# Altium PCB 接口板.PcbDoc
Units mm, origin at the board's own origin, x right, y up, seen from the top; angles counter-clockwise.
Board outline 100 x 250 mm, 2 copper layers (Top Layer, Bottom Layer); 107 components, 70 nets, 276 pads, 0 vias.
Unrouted connection lines stored in the file: 196.
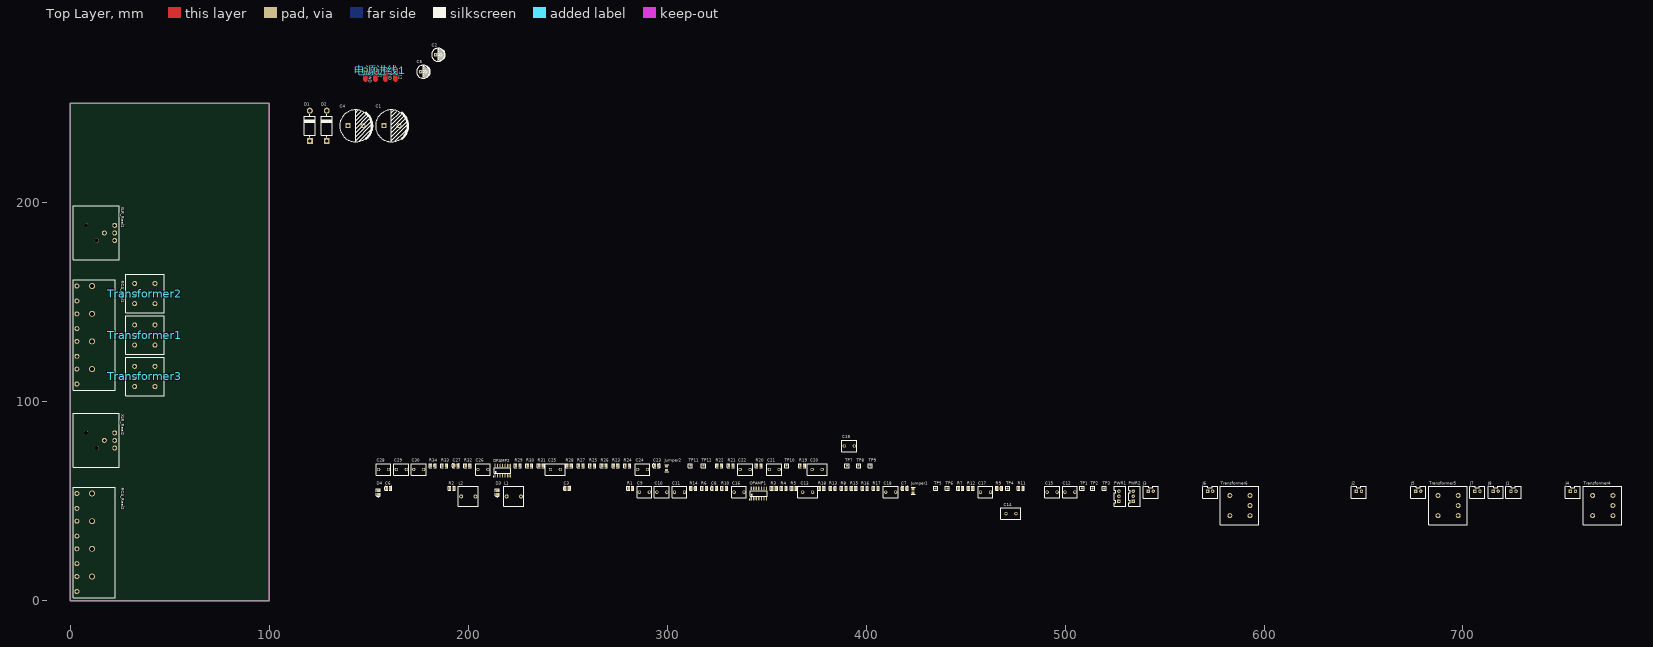
[diagram p0: Top Layer view]
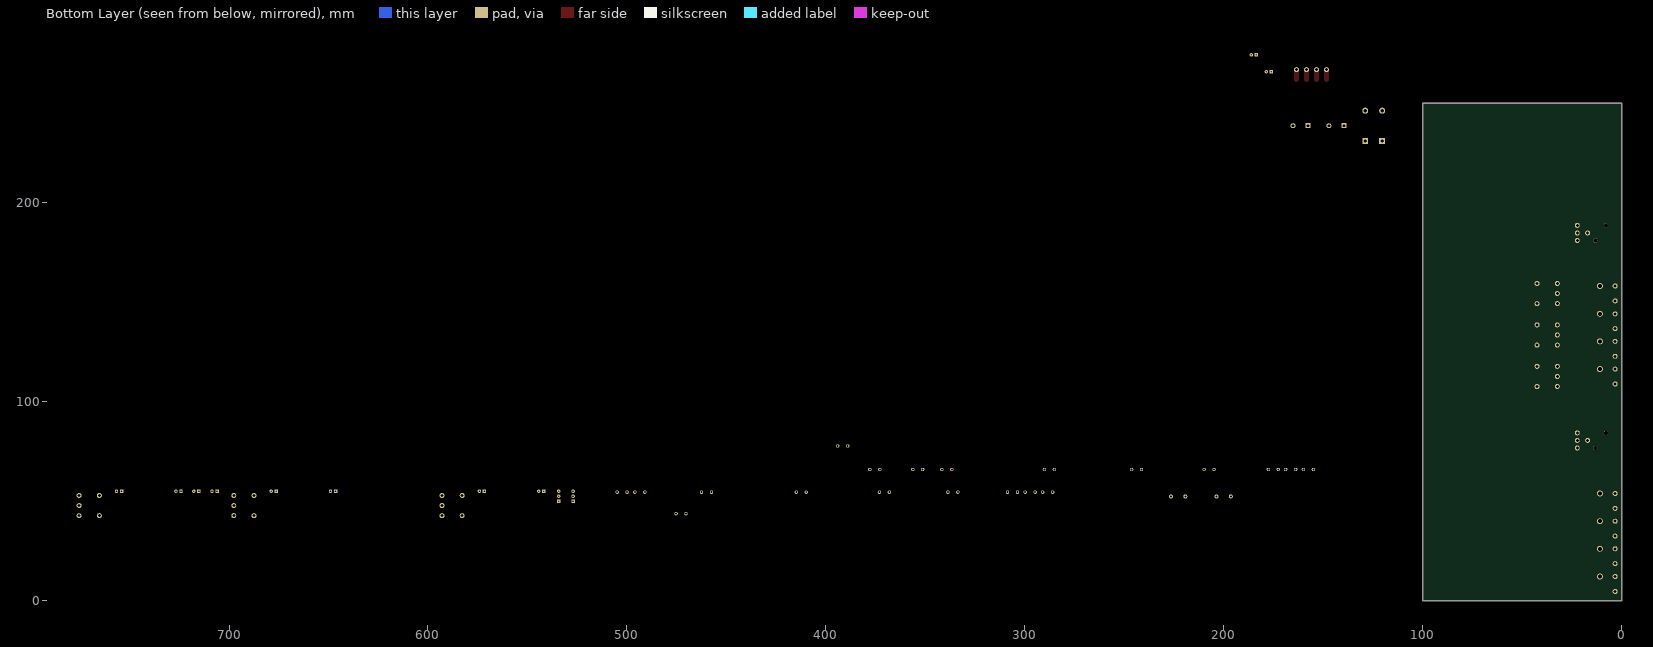
[diagram p1: Bottom Layer view, seen from below]

## Layer stack, top to bottom
Top Solder: solder mask 0.0102, Solder Resist, Dk 3.5
Top Layer: signal copper 0.0356
Dielectric 1: dielectric 0.32, FR-4, Dk 4.8
Bottom Layer: signal copper 0.0356
Bottom Solder: solder mask 0.0102, Solder Resist, Dk 3.5

## Board outline
0,0 0,250 100,250 100,0

## Design rules (kind name [scope] priority, off if disabled: settings)
BoardOutlineClearance [All] p1: gap=0.4 ignorepadtopadclearanceinfootprint=FALSE
Clearance [All] p1: gap=0.152 ignorepadtopadclearanceinfootprint=FALSE
ComponentClearance [All] p1: gap=0.152 collisioncheckmode=3 verticalgap=0 showdistances=FALSE
Height [All] p1: minheight=0 maxheight=50 prefheight=12.7
HoleSize [All] p1: absolutevalues=TRUE maxlimit=6 minlimit=0.3 maxpercent=80.000 minpercent=20.000
HoleToHoleClearance [All] p1: gap=0.152 allowstackedmicrovias=TRUE
MinimumSolderMaskSliver [All] p1: minsoldermaskwidth=0.152
PolygonConnect [All] p1: connectstyle=Relief reliefconductorwidth=0.254 reliefentries=4 polygonreliefangle="90 Angle" airgapwidth=0.254
RoutingVias [All] p1: holewidth=0.3 width=0.6 viastyle="Through Hole" minholewidth=0.3 minwidth=0.6 maxholewidth=3 maxwidth=4
SilkToSilkClearance [All] p1: silktosilkclearance=0
SilkToSolderMaskClearance [IsPad] p1: minsilkscreentomaskgap=0 clearancetoexposedcopper=TRUE
SolderMaskExpansion [All] p1: expansion=0.102
Width [All] p1: maxlimit=5 minlimit=0.152 preferedwidth=0.254
23 further rules are at their usual default settings.

## Classes and differential pairs
component class 接口板: C1 C2 C3 C4 C5 C6 C7 C8 C9 C10 C11 C12 C13 C14 C15 C16 C17 C18 D1 D2 D3 D4 J1 J2 J3 J4 J5 J6 J7 J8 Jumper1 L1 L2 OPAMP1 PWR1 PWR2 R1 R2 R3 R4 R5 R6 R7 R8 R9 R10 R11 R12 R13 R14 R15 R16 R17 R18 RCA_Real1 RCA_Real2 TP1 TP2 TP3 TP4 TP5 TP6 Transformer1 Transformer2 Transformer3 Transformer4 Transformer5 Transformer6 XLR_Real1 XLR_Real2 电源进线1
component class 接口板2: C19 C20 C21 C22 C23 C24 C25 C26 C27 C28 C29 C30 Jumper2 OPAMP2 R19 R20 R21 R22 R23 R24 R25 R26 R27 R28 R29 R30 R31 R32 R33 R34 TP7 TP8 TP9 TP10 TP11 TP12

## Components (designator, comment, footprint, x,y, rotation, side; value= is the part's Value field where it differs from the comment)
C1 "3300u" "CAP 7.5*16*31.5 - BK" 161.417,238.633 r0 top
C2 "100u" "CAP 2.5*6.3*11.2" 184.91,274.32 r0 top
C3 "0805,103" 0805_C 249.682,56.388 r0 top
C4 "3300u" "CAP 7.5*16*31.5 - BK" 143.383,238.633 r0 top
C5 "10u" "CAP 2.5*6.3*11.2" 177.399,265.811 r0 top
C6 "0805,103" 0805_C 159.893,56.388 r0 top
C7 "0805,0.01u" 0805_C 419.354,56.388 r0 top
C8 "0805,0.01u" 0805_C 323.723,56.388 r0 top
C9 "100P" WIMA_5MM 288.544,54.483 r0 top
C10 "100P" WIMA_5MM 297.307,54.483 r0 top
C11 "100P" WIMA_5MM 306.197,54.483 r0 top
C12 "100P" WIMA_5MM 502.412,54.483 r0 top
C13 "330N,WIMA" WIMA_5mmPin*10mmL 370.586,54.483 r0 top
C14 "330N" WIMA_5mmPin*10mmL 472.781,43.688 r0 top
C15 "220P" WIMA_5MM 493.522,54.483 r0 top
C16 "47N" WIMA_5MM 336.169,54.483 r0 top
C17 "WIMA" WIMA_5MM 459.994,54.483 r0 top
C18 "WIMA" WIMA_5MM 412.369,54.483 r0 top
C19 "100P" WIMA_5MM 391.541,77.724 r0 top
C20 "330N" WIMA_5mmPin*10mmL 375.412,65.913 r0 top
C21 "220P" WIMA_5MM 353.822,65.913 r0 top
C22 "WIMA" WIMA_5MM 339.217,65.913 r0 top
C23 "0805,0.01u" 0805_C 294.64,67.818 r0 top
C24 "WIMA" WIMA_5MM 287.655,65.913 r0 top
C25 "330N,WIMA" WIMA_5mmPin*10mmL 243.84,65.913 r0 top
C26 "47N" WIMA_5MM 207.391,65.913 r0 top
C27 "0805,0.01u" 0805_C 193.802,67.818 r0 top
C28 "100P" WIMA_5MM 157.48,65.913 r0 top
C29 "100P" WIMA_5MM 166.37,65.913 r0 top
C30 "100P" WIMA_5MM 175.133,65.913 r0 top
D1 "100V3A" DO-201AD 120.396,238.633 r90 top
D2 "100V3A" DO-201AD 128.905,238.633 r90 top
D3 "红灯 0805" 0805_LED_S3 214.63,54.356 r90 top
D4 "红灯 0805" 0805_LED_S3 154.813,54.356 r90 top
J1 "音频输出" XH2.54-LI-2P 725.424,54.991 r0 top
J2 "音频输出" XH2.54-LI-2P 647.7,54.991 r0 top
J3 "音频输出" XH2.54-LI-2P 543.052,54.991 r0 top
J4 "音频输出" XH2.54-LI-2P 755.269,54.991 r0 top
J5 "音频输出" XH2.54-LI-2P 677.545,54.991 r0 top
J6 "音频输出" XH2.54-LI-2P 572.897,54.991 r0 top
J7 "音频输出" XH2.54-LI-2P 707.263,54.991 r0 top
J8 "音频输出" XH2.54-LI-2P 716.407,54.991 r0 top
Jumper1 "Jumper" 0805_J 423.672,55.118 r90 top
Jumper2 "Jumper" 0805_J 299.72,66.548 r90 top
L1 "330uH" INDUCTOR 222.885,52.324 r0 top
L2 "330uH" INDUCTOR 200.025,52.324 r0 top
OPAMP1 "4277UA" SOIC-14_150MIL 346.075,53.848 r0 top
OPAMP2 "4277UA" SOIC-14_150MIL 217.297,65.278 r0 top
PWR1 "电源接口" XH2.54-LI-3P 527.05,52.451 r90 top
PWR2 "电源接口" XH2.54-LI-3P 534.289,52.451 r90 top
R1 "0805,1k" 0805_R 281.559,56.388 r0 top
R2 "0805,1k" 0805_R 191.77,56.388 r0 top
R3 "0805,2.87K" 0805_R 353.695,56.388 r0 top
R4 "0805,1.47K" 0805_R 358.648,56.388 r0 top
R5 "0805,750Ω" 0805_R 363.728,56.388 r0 top
R6 "0805,5.11K" 0805_R 318.643,56.388 r0 top
R7 "0805,5.11K" 0805_R 447.421,56.388 r0 top
R8 "0805,5.11K" 0805_R 388.747,56.388 r0 top
R9 "0805,5.11K" 0805_R 466.852,56.388 r0 top
R10 "0805,16.2K" 0805_R 328.676,56.388 r0 top
R11 "0805,2.87K" 0805_R 477.774,56.388 r0 top
R12 "0805,1.78K" 0805_R 452.501,56.388 r0 top
R13 "0805,750Ω" 0805_R 383.159,56.388 r0 top
R14 "0805,1.62K" 0805_R 313.055,56.388 r0 top
R15 "0805,0.1Ω" 0805_R 393.7,56.388 r0 top
R16 "0805,0.1Ω" 0805_R 399.288,56.388 r0 top
R17 "0805" 0805_R 404.876,56.388 r0 top
R18 "0805,0.1Ω" 0805_R 377.571,56.388 r0 top
R19 "0805,2.87K" 0805_R 367.919,67.818 r0 top
R20 "0805,5.11K" 0805_R 346.075,67.818 r0 top
R21 "0805,5.11K" 0805_R 331.978,67.818 r0 top
R22 "0805,1.78K" 0805_R 326.136,67.818 r0 top
R23 "0805,0.1Ω" 0805_R 274.066,67.818 r0 top
R24 "0805" 0805_R 279.908,67.818 r0 top
R25 "0805,5.11K" 0805_R 262.382,67.818 r0 top
R26 "0805,0.1Ω" 0805_R 268.224,67.818 r0 top
R27 "0805,750Ω" 0805_R 256.54,67.818 r0 top
R28 "0805,0.1Ω" 0805_R 250.698,67.818 r0 top
R29 "0805,2.87K" 0805_R 224.917,67.818 r0 top
R30 "0805,1.47K" 0805_R 230.759,67.818 r0 top
R31 "0805,750Ω" 0805_R 236.601,67.818 r0 top
R32 "0805,16.2K" 0805_R 199.644,67.818 r0 top
R33 "0805,5.11K" 0805_R 187.96,67.818 r0 top
R34 "0805,1.62K" 0805_R 182.118,67.818 r0 top
RCA_Real1 "RCA接口_Real" RCA_REAL 12.065,133.47 r90 top
RCA_Real2 "RCA接口_Real" RCA_REAL 12.065,29.21 r90 top locked
TP1 "测试点" TESTPOINT 508.508,56.388 r0 top
TP2 "测试点" TESTPOINT 513.842,56.388 r0 top
TP3 "测试点" TESTPOINT 519.684,56.388 r0 top
TP4 "测试点" TESTPOINT 471.17,56.388 r0 top
TP5 "测试点" TESTPOINT 434.975,56.388 r0 top
TP6 "测试点" TESTPOINT 440.817,56.388 r0 top
TP7 "测试点" TESTPOINT 390.398,67.818 r0 top
TP8 "测试点" TESTPOINT 396.24,67.818 r0 top
TP9 "测试点" TESTPOINT 402.082,67.818 r0 top
TP10 "测试点" TESTPOINT 360.045,67.818 r90 top
TP11 "测试点" TESTPOINT 311.658,67.818 r90 top
TP12 "测试点" TESTPOINT 318.262,67.818 r90 top
Transformer1 "隔离变压器" TRANSFORMER 37.592,133.477 r180 top
Transformer2 "隔离变压器" TRANSFORMER 37.592,154.305 r180 top
Transformer3 "隔离变压器" TRANSFORMER 37.592,112.649 r180 top
Transformer4 "隔离变压器" TRANSFORMER 770.128,47.752 r0 top
Transformer5 "隔离变压器" TRANSFORMER 692.404,47.752 r0 top
Transformer6 "隔离变压器" TRANSFORMER 587.756,47.752 r0 top
XLR_Real1 "XLR接插口" XLR_REAL 13.081,184.785 r270 top
XLR_Real2 "XLR接插口" XLR_REAL 13.081,80.518 r270 top locked
电源进线1 "接口板电源进线" AC_ADAPTOR_INPUT 155.956,266.827 r270 top

## Footprints (in the part's own frame and the unit in brackets; to place one, negate y for a bottom-side part, rotate by r counter-clockwise, add the part's x,y. Pads: shape width x height; smd on the part's side, far side on the other; paste and mask are expansions set on the pad)
0805_C [mm]
  rect 1.16x1.47 smd: 1(-0.89,0) 2(0.89,0)
  silkscreen extent -1.77,-1.04 1.77,1.04, body extent -1,-0.62 1,0.63, height 0.77
0805_J [mm]
  rect 1.16x1.47 smd: 1(-0.89,0) 2(0.89,0)
  silkscreen extent -1.77,-1.04 1.77,1.03, body extent -1,-0.62 1,0.63, height 0.49
0805_LED_S3 [mm]
  rect 1.16x1.47 smd: A(0.89,0) K(-0.89,0)
  silkscreen extent -2.31,-1.04 1.77,1.03, body extent -1.01,-0.62 1.01,0.62, height 1.1
0805_R [mm]
  rect 1.16x1.47 smd: 1(-0.89,0) 2(0.89,0)
  silkscreen extent -1.77,-1.04 1.77,1.03, body extent -1,-0.62 1,0.63, height 0.49
AC_ADAPTOR_INPUT [mm] "AC适配器的输入 代地球地接口"
  round 2.54 hole 1.5: 1(0,7.46) 2(0,2.46) 3(0,-2.54) 4(0,-7.54)
  Top Layer lines w2.54: 5,-7.54 0,-7.54 ; 5,-2.54 0,-2.54 ; 5,2.46 0,2.46 ; 5,7.46 0,7.46
"CAP 2.5*6.3*11.2" [mm] "脚距2.5mm直径6.3mm高度11.2mm"
  rect 1.7x1.7 hole 0.8: 1(-1.25,0)
  round 1.7 hole 0.8: 2(1.25,0)
  silkscreen extent -3.3,-3.3 3.56,3.3, body extent -3.15,-3.15 3.16,3.15, height 11.23
"CAP 7.5*16*31.5 - BK" [mm] "脚距7.5mm直径16mm高度31.5mm"
  rect 2.5x2.5 hole 1.4: 1(-3.8,0.038)
  round 2.5 hole 1.4: 2(3.8,0.038)
  silkscreen extent -8,-8 8.42,8, body extent -8,-8 8.01,8, height 31.54
DO-201AD [mm] "5.2*15.2mm(直径，脚距）"
  rect 3x3 hole 1.6: 1(-7.6,0)
  round 3 hole 1.6: 2(7.6,0)
  silkscreen extent -5.84,-2.79 5.84,2.79, body extent -8.25,-2.6 8.25,2.6, height 5.25
INDUCTOR [mm] "裸体直插电感 330uH"
  round 2 hole 1: 1(-3.556,0) 2(3.683,0)
  silkscreen extent -4.95,-5.02 5.08,5.02
RCA_REAL [mm] "RCA外部接口"
  round 2.5 hole 1.5: 1(-24.638,8.763) 2(-17.138,8.763) 3(-10.668,8.763) 4(-3.168,8.763) 5(3.175,8.763) 6(10.675,8.763) 7(17.145,8.763) 8(24.645,8.763)
  round 3 hole 2: 9(-17.138,1.113) 10(-3.168,1.113) 11(10.675,1.113) 12(24.645,1.113)
  silkscreen extent -27.69,-10.54 27.69,10.54
SOIC-14_150MIL [mm]
  oval 0.6x1.8 smd: 1(-3.81,-2.6) 2(-2.54,-2.6) 3(-1.27,-2.6) 4(0,-2.6) 5(1.27,-2.6) 6(2.54,-2.6) 7(3.81,-2.6) 8(3.81,2.6) 9(2.54,2.6) 10(1.27,2.6) 11(0,2.6) 12(-1.27,2.6) 13(-2.54,2.6) 14(-3.81,2.6)
  silkscreen extent -4.75,-3.15 4.2,1.4
TESTPOINT [mm]
  round 1 smd: 1(0,0)
  silkscreen extent -1.02,-1.02 1.02,1.02
TRANSFORMER [mm] "1:1隔离变压器"
  round 2.5 hole 1.5: 1(-4.953,5.08) 2(-4.953,-5.08) 3(5.207,-5.08) 4(5.207,0) 5(5.207,5.08)
  silkscreen extent -9.65,-9.65 9.65,9.65
WIMA_5MM [mm] "WIMA_5mm*7.2*4.5*5.8(PIN*L*W*H)"
  round 1.7 hole 1: 1(-2.5,0) 2(2.5,0)
  silkscreen extent -3.7,-2.92 3.7,2.92
WIMA_5mmPin*10mmL [mm] "WIMA_5mm*10*4.5*5.8(PIN*L*W*H)"
  round 1.7 hole 1: 1(-2.5,0) 2(2.5,0)
  silkscreen extent -5,-2.92 5,2.92
XH2.54-LI-2P [mm] "接插件，2P"
  rect 1.7x1.7 hole 0.9: 1(-1.27,0)
  round 1.7 hole 0.9: 2(1.27,0)
  silkscreen extent -3.81,-3.51 3.74,2.37, body extent -3.77,-3.3 3.77,2.4, height 7.05
XH2.54-LI-3P [mm] "接插件，3P"
  rect 1.7x1.7 hole 0.9: 1(-2.54,0)
  round 1.7 hole 0.9: 2(0,0) 3(2.54,0)
  silkscreen extent -4.95,-3.38 4.93,2.39, body extent -5.04,-3.3 5.04,2.4, height 7.03
XLR_REAL [mm] "XLR实体接口"
  round 2.5 hole 1.5: 1(-3.81,9.264) 2(3.81,9.264) 3(0,9.264) 4(0,4.064)
  round 2 hole 2 unplated paste+0: ""(-3.81,-5.086) ""(3.81,0.164)
  silkscreen extent -13.59,-11.56 13.59,11.56

## Part data
C1 C2 C4 C5: library part C直插电解
C3 C6 C7 C8 C23 C27: library part C0805
C9 C10 C11 C12 C17 C18 C19 C22 C24 C28 C29 C30: library part WIMA_CAP_100P
C13 C14 C20 C25: library part WIMA_CAP_330N
C15 C21: library part WIMA_CAP_220P
C16 C26: library part WIMA_CAP_47N
D1 D2: library part 1N5401
D3 D4: library part "0805 红灯", "发光二极管"
L1 L2: library part 直插裸体电感330uH
OPAMP1 OPAMP2: library part OPA4277UA
R1 R2 R3 R4 R5 R6 R7 R8 R9 R10 R11 R12 R13 R14 R15 R16 R17 R18 R19 R20 R21 R22 R23 R24 R25 R26 R27 R28 R29 R30 R31 R32 R33 R34: library part R0805
XLR_Real1 XLR_Real2: library part XLR接口_Real

## Nets (pads, with @x,y where several pads share a name; then routed paths per layer and width w, separated by ;. In a path a pad name is that pad's centre, name@x,y a point inside that pad or via, vN(x,y) a via of type N, cw(c..) or ccw(c..) an arc to the next point about the centre after c; other vN are vias at no path point)
+12: C1.1 C2.1 C3.1 C7.1 C23.1 D2.2 OPAMP1.4 OPAMP2.4 PWR1.3 PWR2.3 R1.2
-12: C4.2 C5.2 C6.2 C8.1 C27.1 D1.1 D4.K OPAMP1.11 OPAMP2.11 PWR1.1 PWR2.1
EGND: XLR_Real1.4 XLR_Real2.4 电源进线1.4
GND: C1.2 C2.2 C3.2 C4.1 C5.1 C6.1 C7.2 C8.2 C9.2 C10.2 C11.2 C14.1 C20.1 C23.2 C27.2 C28.2 C29.2 C30.2 D3.K J1.2 J2.2 J3.2 J4.2 J5.2 J6.2 J7.2 J8.2 PWR1.2 PWR2.2 R2.2 R6.1 R10.1 R14.1 R18.2 R28.2 R32.1 R33.1 R34.1 RCA_Real1.9 RCA_Real2.9 Transformer1.2 Transformer2.2 Transformer3.2 Transformer4.2 Transformer5.2 Transformer6.2 XLR_Real1.3 XLR_Real2.3 电源进线1.2
GNDM_L: RCA_Real1.11 Transformer2.3
GNDM_R: RCA_Real2.11 Transformer5.3
GNDT_L: RCA_Real1.10 Transformer1.3
GNDT_R: RCA_Real2.10 Transformer4.3
GNDW_L: RCA_Real1.12 Transformer3.3
GNDW_R: RCA_Real2.12 Transformer6.3
INPUT_RCA_L: R3.1 RCA_Real1.7 RCA_Real1.8
INPUT_RCA_R: R29.1 RCA_Real2.7 RCA_Real2.8
NetC9_1: C9.1 R3.2 R4.1
NetC10_1: C10.1 R4.2 R5.1
NetC11_1: C11.1 OPAMP1.3 R5.2 R6.2 R8.1
NetC12_1: C12.1 OPAMP1.2 R7.1 R9.1
NetC12_2: C12.2 C13.1 Jumper1.1 OPAMP1.1 R9.2 TP1.1
NetC13_2: C13.2 Jumper1.2 OPAMP1.5 R10.2
NetC14_2: C14.2 R11.1
NetC15_1: C15.1 OPAMP1.6 R11.2 R12.1
NetC15_2: C15.2 OPAMP1.7 R12.2 R13.1 TP2.1
NetC16_1: C16.1 OPAMP1.10 R13.2
NetC16_2: C16.2 R14.2
NetC17_1: C17.1 OPAMP1.13 OPAMP1.14 TP4.1
NetC17_2: C17.2 R16.2 R18.1 TP5.1
NetC18_1: C18.1 OPAMP1.12 R16.1
NetC18_2: C18.2 R17.2
NetC19_1: C19.1 OPAMP2.2 R20.1 R21.1
NetC19_2: C19.2 C25.1 Jumper2.1 OPAMP2.1 R20.2 TP7.1
NetC20_2: C20.2 R19.1
NetC21_1: C21.1 OPAMP2.6 R19.2 R22.1
NetC21_2: C21.2 OPAMP2.7 R22.2 R27.1 TP8.1
NetC22_1: C22.1 OPAMP2.13 OPAMP2.14 TP10.1
NetC22_2: C22.2 R23.2 R28.1 TP11.1
NetC24_1: C24.1 OPAMP2.12 R23.1
NetC24_2: C24.2 R24.2
NetC25_2: C25.2 Jumper2.2 OPAMP2.5 R32.2
NetC26_1: C26.1 OPAMP2.10 R27.2
NetC26_2: C26.2 R34.2
NetC28_1: C28.1 R29.2 R30.1
NetC29_1: C29.1 R30.2 R31.1
NetC30_1: C30.1 OPAMP2.3 R25.1 R31.2 R33.2
NetD1_2: D1.2 L2.2
NetD2_1: D2.1 L1.2
NetD3_A: D3.A R1.1
NetD4_A: D4.A R2.1
NetJ1_1: J1.1 Transformer1.1
NetJ2_1: J2.1 Transformer2.1
NetJ3_1: J3.1 Transformer3.1
NetJ4_1: J4.1 Transformer4.1
NetJ5_1: J5.1 Transformer5.1
NetJ6_1: J6.1 Transformer6.1
NetL1_1: L1.1 电源进线1.1
NetL2_1: L2.1 电源进线1.3
NetOPAMP1_8: OPAMP1.8 OPAMP1.9 R15.1 TP3.1
NetOPAMP2_8: OPAMP2.8 OPAMP2.9 R26.1 TP9.1
NetR17_1: R17.1 TP6.1
NetR24_1: R24.1 TP12.1
OPAMP_BOARD_L: J7.1 R15.2
OPAMP_BOARD_R: J8.1 R26.2
OUTPUT_M_L: RCA_Real1.5 RCA_Real1.6 Transformer2.5
OUTPUT_M_R: RCA_Real2.5 RCA_Real2.6 Transformer5.5
OUTPUT_T_L: RCA_Real1.3 RCA_Real1.4 Transformer1.5
OUTPUT_T_R: RCA_Real2.3 RCA_Real2.4 Transformer4.5
OUTPUT_W_L: RCA_Real1.1 RCA_Real1.2 Transformer3.5
OUTPUT_W_R: RCA_Real2.1 RCA_Real2.2 Transformer6.5
XLR_IN_L_Cold: R7.2 XLR_Real1.1
XLR_IN_L_Hot: R8.2 XLR_Real1.2
XLR_IN_R_Cold: R21.2 XLR_Real2.1
XLR_IN_R_Hot: R25.2 XLR_Real2.2
pads on no net: Transformer1.4 Transformer2.4 Transformer3.4 Transformer4.4 Transformer5.4 Transformer6.4 XLR_Real1. XLR_Real2.

## Keep-outs
Keep-Out Layer:
  lines w0.152: 0,0 0,100 0,200 0,250 100,250 100,200 100,100 100,0 0,0

## Text inside footprints (layer, text, board x,y; h text height)
电源进线1: Top Overlay "EGND" at 150.114,266.065 h1.52 r270; Top Overlay "-12" at 155.067,266.065 h1.52 r270; Top Overlay "GND" at 160.02,266.065 h1.52 r270; Top Overlay "+12" at 165.1,266.065 h1.52 r270